# Altium PCB backpower_main.PcbDoc
Units mil, origin at the board's own origin, x right, y up, seen from the top; angles counter-clockwise.
Board outline 3650 x 3890 mil, 2 copper layers (Top Layer, Bottom Layer); 24 components, 12 nets, 64 pads, 27 vias.
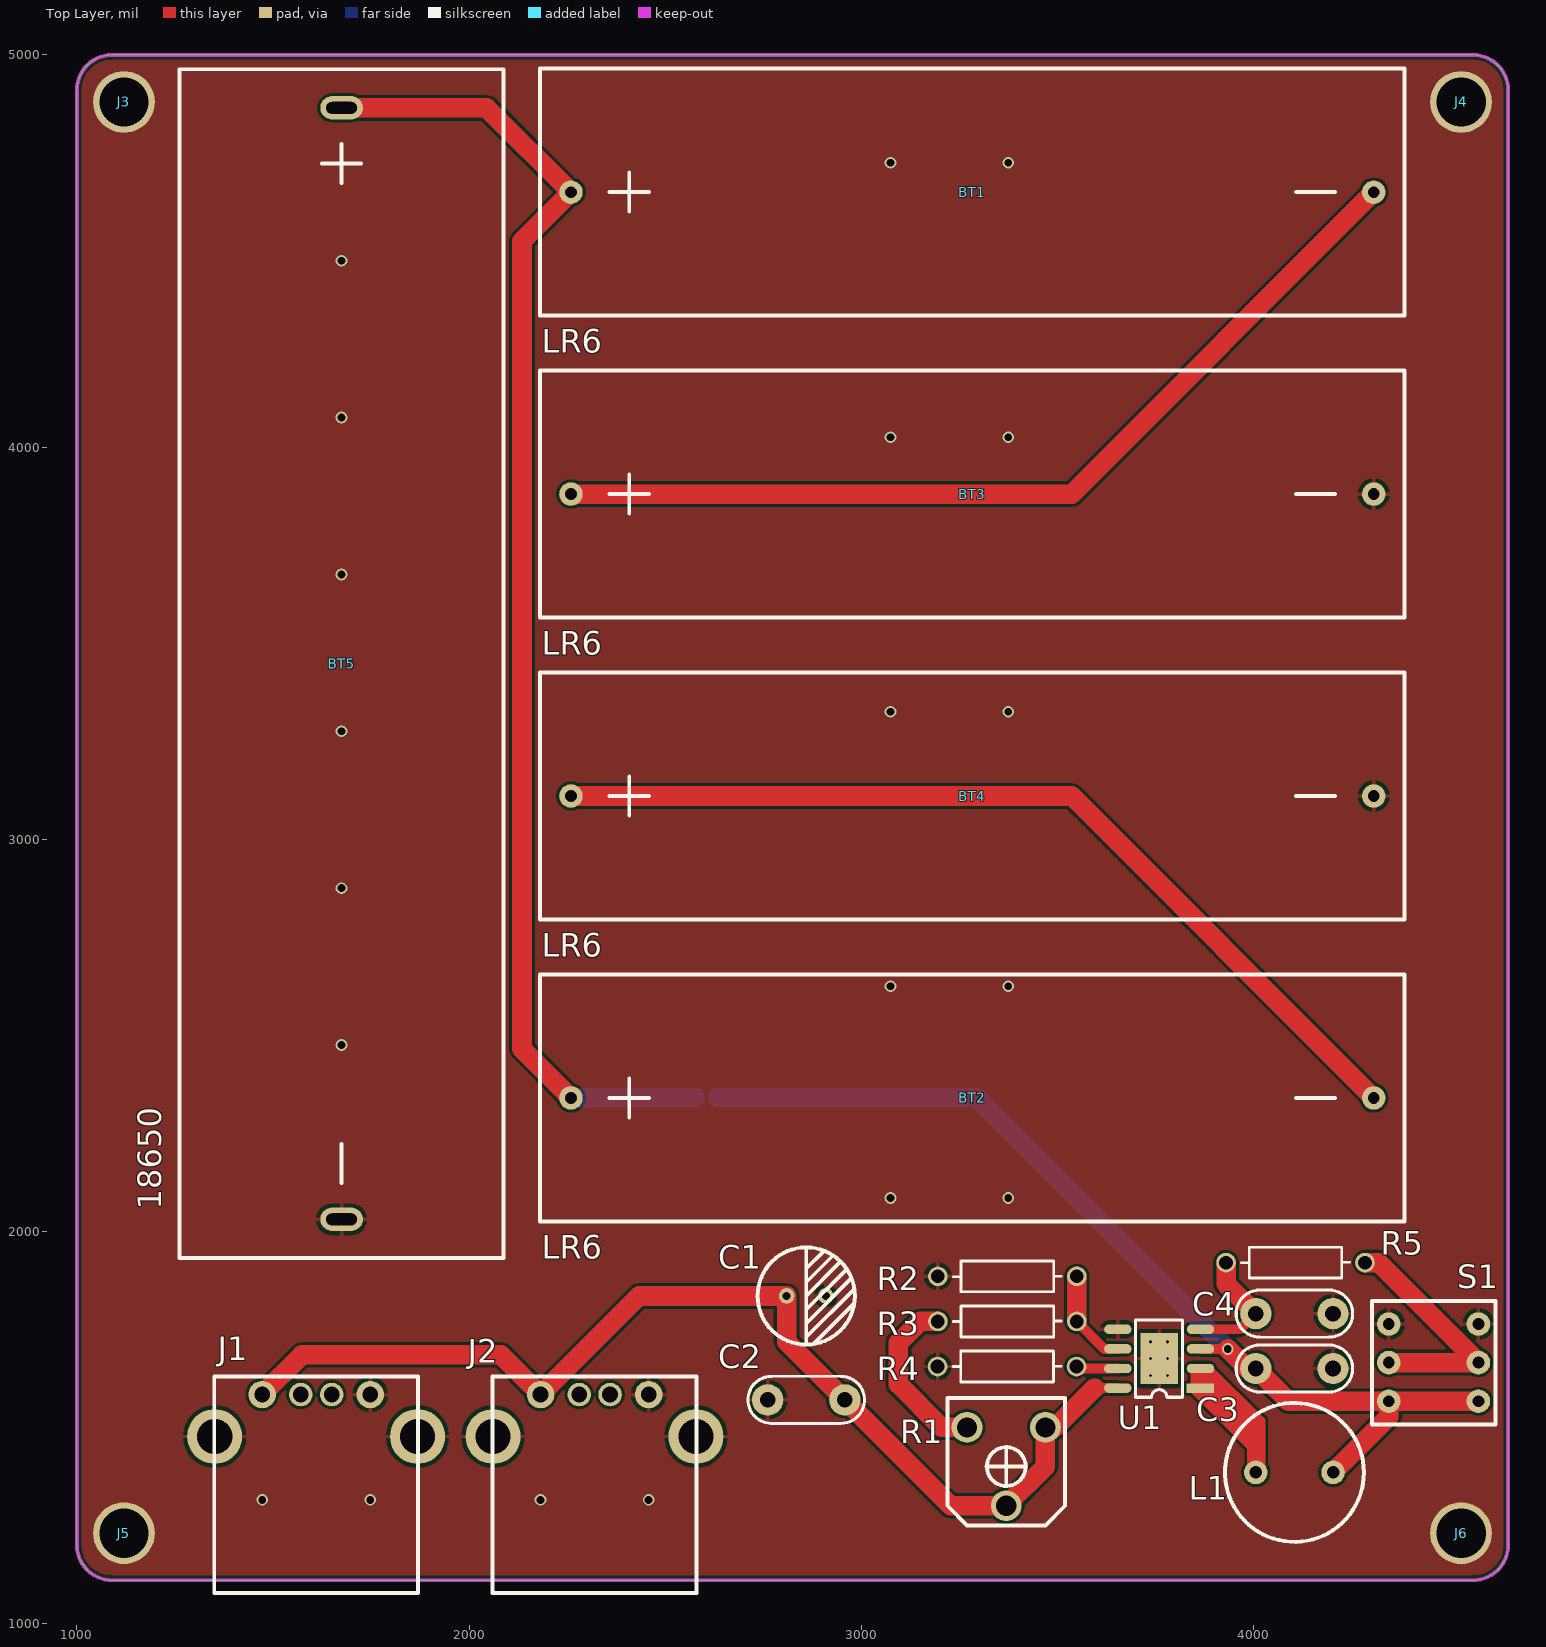
[diagram p0: Top Layer view]
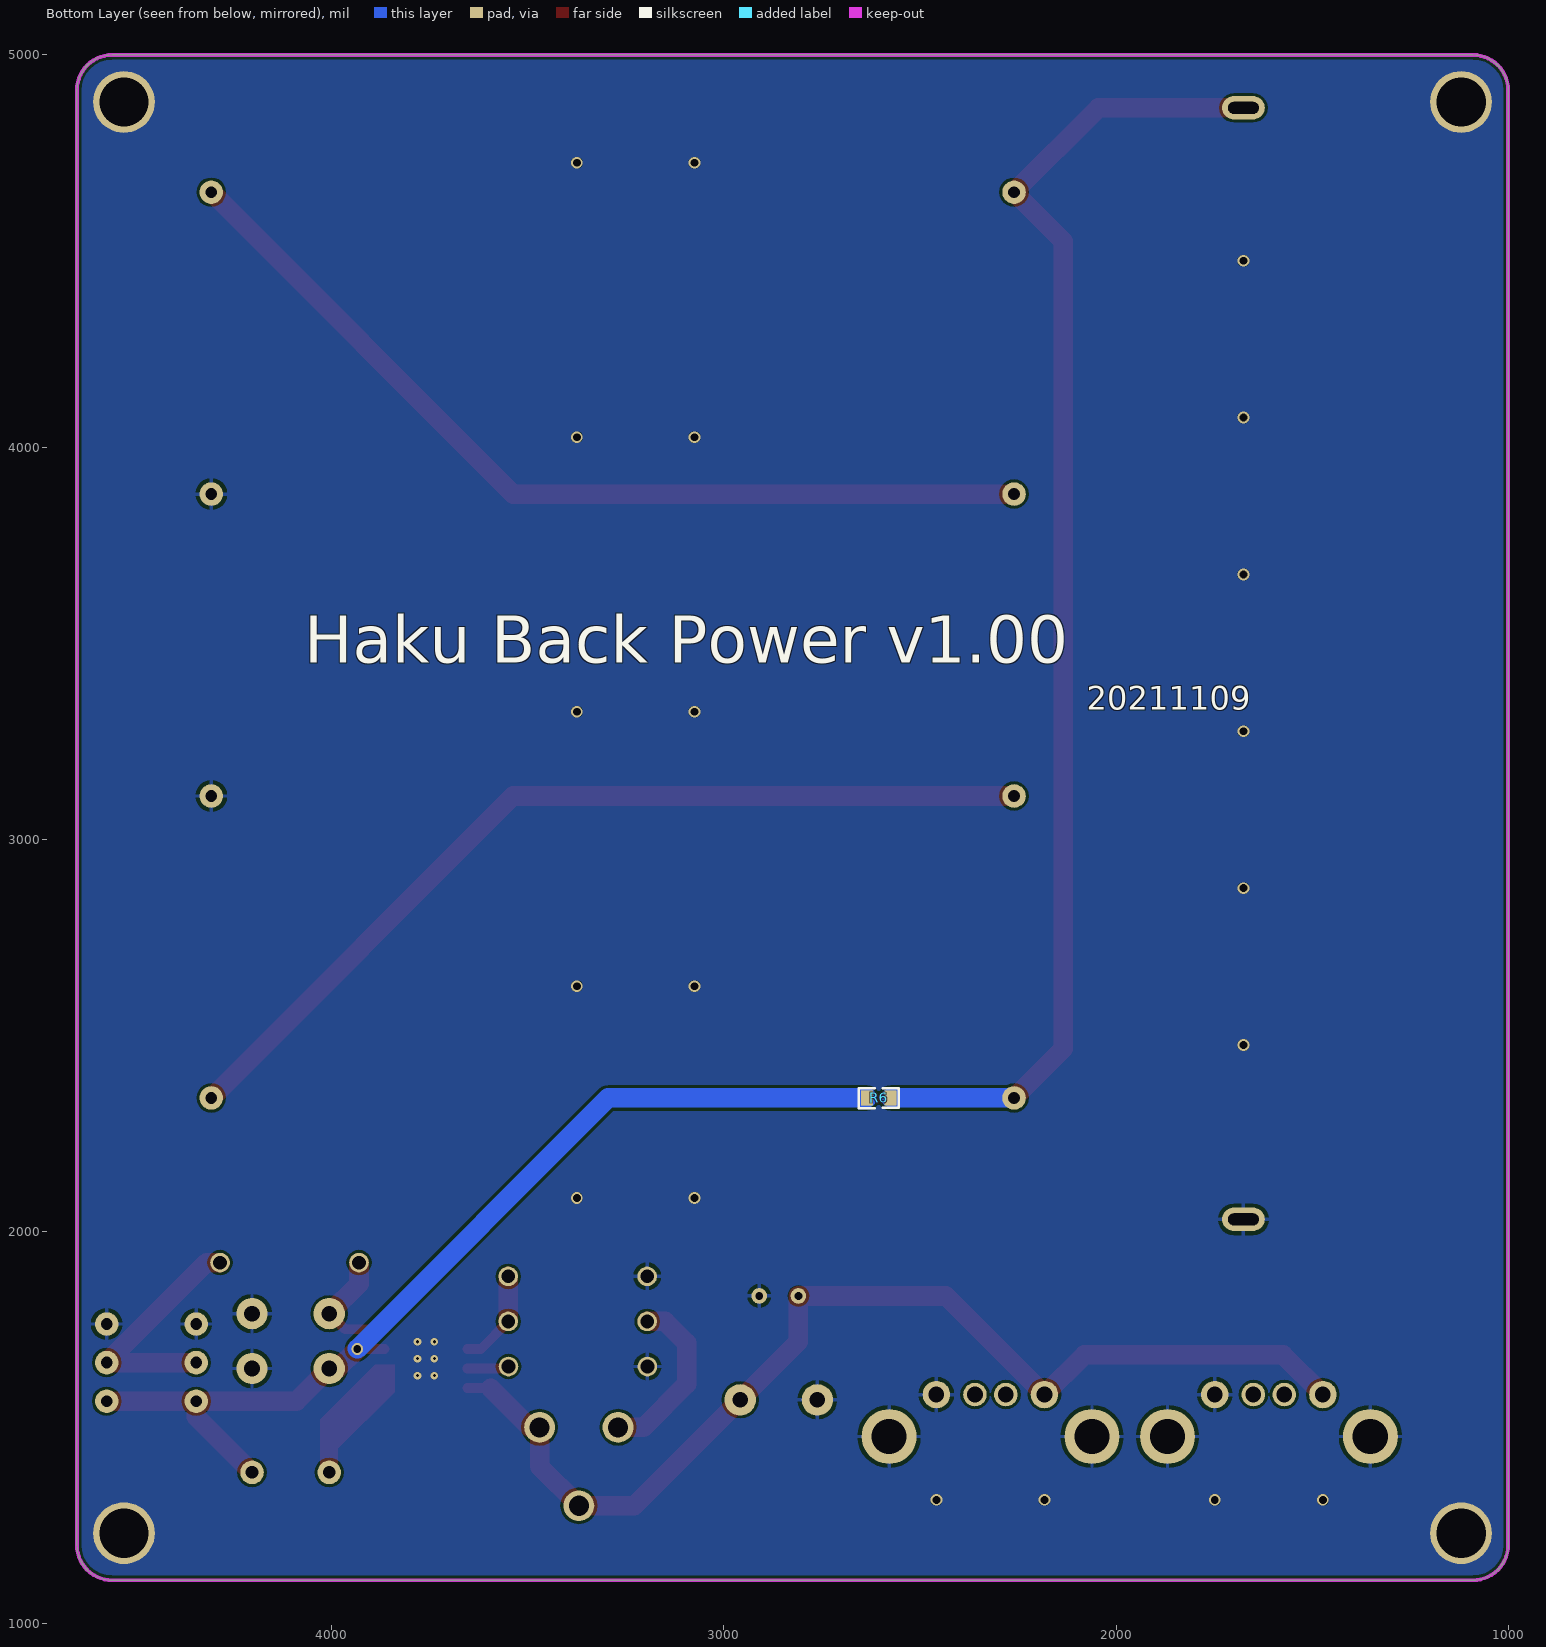
[diagram p1: Bottom Layer view, seen from below]

## Layer stack, top to bottom
Top Solder: solder mask 0.4, Solder Resist, Dk 3.5
Top Layer: signal copper 1.4
Dielectric 1: dielectric 12.6, FR-4, Dk 4.8
Bottom Layer: signal copper 1.4
Bottom Solder: solder mask 0.4, Solder Resist, Dk 3.5

## Board outline
1000,1200 1000,4910 cw(c1090,4910) 1090,5000 4560,5000 cw(c4560,4910) 4650,4910 4650,1200 cw(c4560,1200) 4560,1110 1090,1110 cw(c1090,1200)

## Design rules (kind name [scope] priority, off if disabled: settings)
Clearance [All] p1: gap=7 ignorepadtopadclearanceinfootprint=FALSE
DiffPairsRouting [All] p1: maxlimit=1000 minlimit=7 mostfreqgap=10 toplayer_minwidth=7 toplayer_maxwidth=1500 toplayer_prefwidth=15 bottomlayer_minwidth=7 bottomlayer_maxwidth=1500 bottomlayer_prefwidth=15 maxuncoupledlength=500
HoleSize [All] p1: absolutevalues=TRUE maxlimit=1000 minlimit=7 maxpercent=80.000 minpercent=20.000
PolygonConnect PolygonConnect_Via [(InPadClass('All Pads') And (not HasFootprint('PADR3/4')))] p1: connectstyle=Relief reliefconductorwidth=10 reliefentries=4 polygonreliefangle="90 Angle" airgapwidth=10
PolygonConnect PolygonConnect_Hole [HasFootprint('PADR3/4')] p2: connectstyle=Direct reliefconductorwidth=10 reliefentries=4 polygonreliefangle="90 Angle" airgapwidth=10
PolygonConnect [HasFootprint('PADR3/4')] p3: connectstyle=Direct reliefconductorwidth=10 reliefentries=4 polygonreliefangle="90 Angle" airgapwidth=10
RoutingCorners [All] p1: cornerstyle=45-Degree minsetback=10 maxsetback=100
RoutingVias [All] p1: holewidth=28 width=50 viastyle="Through Hole" minholewidth=10 minwidth=10 maxholewidth=200 maxwidth=500
SilkToSilkClearance [All] p1 off: silktosilkclearance=10
SilkToSolderMaskClearance [IsPad] p1 off: minsilkscreentomaskgap=10 clearancetoexposedcopper=TRUE
SolderMaskExpansion [All] p1: expansion=4
Width [All] p1: maxlimit=1000 minlimit=7 preferedwidth=10
25 further rules are at their usual default settings.

## Components (designator, comment, footprint, x,y, rotation, side; value= is the part's Value field where it differs from the comment)
BT1 "LR6" BAT-LR6 3283.62,4650 r0 top locked
BT2 "LR6" BAT-LR6 3283.62,2340 r0 top locked
BT3 "LR6" BAT-LR6 3283.62,3880 r0 top locked
BT4 "LR6" BAT-LR6 3283.62,3110 r0 top locked
BT5 "18650" BAT-18650 1675,3447.68 r270 top locked
C1 "100uF" "CAP D6.3" 2860,1835 r0 top value=100pF
C2 "226" C5mm 2860,1570 r180 top value=100pF
C3 "226" C5mm 4105,1650 r180 top locked value=100pF
C4 "102" C5mm 4105,1790 r180 top locked value=100pF
J1 "USB_A" "USB-A dip" 1610,1530 r0 top locked
J2 "USB_A" "USB-A dip" 2320,1530 r0 top locked
J3 "Hole" PADR3/4#1 1105,4880 r0 top locked
J4 "Hole" PADR3/4#2 4540,4865 r0 top locked
J5 "Hole" PADR3/4#3 1110,1225 r0 top locked
J6 "Hole" PADR3/4#4 4520,1215 r0 top locked
L1 "3R3" CKPK0912 4105,1385 r0 top locked value=10mH
R1 "503" VZ067 3370,1400 r180 top locked
R2 "10K" R1/4W 3550,1885 r180 top locked value=1K
R3 "68K" R1/4W 3195.67,1770 r0 top locked value=1K
R4 "100K" R1/4W 3195,1655 r0 top locked value=1K
R5 "10K" R1/4W 3930.67,1920 r0 top locked value=1K
R6 "0" R0603 2575,2340 r0 bottom value=1K
S1 "SW-DPDT" SW-8*8 4460,1665 r90 top locked
U1 "FP6276B" SOP8L_EP 3760,1675 r180 top locked

## Footprints (in the part's own frame and the unit in brackets; to place one, negate y for a bottom-side part, rotate by r counter-clockwise, add the part's x,y. Pads: shape width x height; smd on the part's side, far side on the other; paste and mask are expansions set on the pad)
BAT-18650 [mil]
  oval 60x108.74 hole 30 slot 78.74 at 90 deg: 1(-1417.32,0) 2(1417.32,0)
  silkscreen extent -1516,-413 1516,413
BAT-LR6 [mil]
  round 60 hole 30: 1(-1023.62,0) 2(1023.62,0)
  silkscreen extent -1102,-315 1102,315
C5mm [mil]
  round 80 hole 40: 1(-98.43,0) 2(98.43,0)
  silkscreen extent -148,-60 148,60, body extent -108,-49 108,49, height 197
"CAP D6.3" [mil] "D=6.3mm"
  round 40 hole 20: 1(-50,0) 2(50,0)
  silkscreen extent -124,-124 124,124
CKPK0912 [mil] "0912"
  round 60 hole 32: 1(-98.43,0) 2(98.43,0)
  silkscreen extent -177,-177 177,177
PADR3/4#1 [mm]
  round 4 hole 3.2: 1(0.381,0)
PADR3/4#2 [mm]
  round 4 hole 3.2: 1(-0.254,0.381)
PADR3/4#3 [mm]
  round 4 hole 3.2: 1(0.254,0.127)
PADR3/4#4 [mm]
  round 4 hole 3.2: 1(0.254,0.381)
R1/4W [mil]
  round 50 hole 35: 1(0,0) 2(354.33,0)
  silkscreen extent 39,-39 315,39, body extent -11,-40 363,39, height 79
R0603 [mil]
  rect 30x38 smd: 1(0,0) 2(60,0)
  silkscreen extent -21,-25 81,26, body extent -4,-19 64,19, height 22
SOP8L_EP [mil]
  rect 70x24 smd: 1(-105.32,75)
  oval 70x24 smd: 2(-105.32,25) 3(-105.32,-25) 4(-105.32,-75) 5(105.31,-75) 6(105.31,-25) 7(105.31,25) 8(105.31,75)
  rect 95.28x130.31 smd: 9(0,0)
  silkscreen extent -60,-98 60,98, body extent -118,-96 118,96, height 67
SW-8*8 [mil]
  round 60 hole 30: 1(0,114.17) 2(-98.43,114.17) 3(98.43,114.17) 4(0,-114.17) 5(-98.43,-114.17) 6(98.43,-114.17)
  silkscreen extent -157,-157 157,157
"USB-A dip" [mil]
  round 70 hole 40: 1(-137.5,53.5) 4(138.1,53.5)
  round 60 hole 40: 2(-39.1,53.5) 3(39.7,53.5)
  round 140 hole 90: 5(-258.7,-53.5) 6(258.7,-53.5)
  silkscreen extent -260,-453 260,100
VZ067 [mm] "VZ067 Variable Resistor"
  round 2 hole 1.3: 1(-2.54,-2.54) 2(0,2.54) 3(2.54,-2.54)
  silkscreen extent -3.81,-4.45 3.81,3.81

## Part data
BT1 BT2 BT3 BT4 BT5: library part Battery, "Multicell Battery", LatestRevisionDate=17-Jul-2002, LatestRevisionNote="Re-released for DXP Platform.", PackageDescription="Battery; 2 Leads", PackageReference=BAT-2, Published=24-Mar-1999, Publisher="Altium Limited"
C1: library part "Cap Pol1", "Polarized Capacitor (Radial)", LatestRevisionDate=17-Jul-2002, LatestRevisionNote="Re-released for DXP Platform.", PackageDescription="Polarized Capacitor (Radial); 2 Leads", PackageReference=RB7.6-15, Published=8-Jun-2000, Publisher="Altium Limited"
C2 C3 C4: library part Cap, "Capacitor", LatestRevisionDate=17-Jul-2002, LatestRevisionNote="Re-released for DXP Platform.", PackageDescription="Radial Cap, Thru-Hole; 2 Leads; 0.3 in Pin Spacing", PackageReference=RAD-0.3, Published=8-Jun-2000, Publisher="Altium Limited"
L1: library part "Inductor Iron", "Magnetic-Core Inductor", LatestRevisionDate=17-Jul-2002, LatestRevisionNote="Re-released for DXP Platform.", PackageDescription="Axial Device, Thru-Hole; 2 Leads; 0.9 in Pin Spacing", PackageReference=AXIAL-0.9, Published=24-Mar-1999, Publisher="Altium Limited"
R1: library part "Res Adj1"
R2 R3 R4 R5 R6: library part Res2, "Resistor", LatestRevisionDate=17-Jul-2002, LatestRevisionNote="Re-released for DXP Platform.", PackageDescription="Axial Device, Thru-Hole; 2 Leads; 0.4 in Pin Spacing", PackageReference=AXIAL-0.4, Published=8-Jun-2000, Publisher="Altium Limited"
S1: "Double-Pole, Double-Throw Switch", LatestRevisionDate=17-Jul-2002, LatestRevisionNote="Re-released for DXP Platform.", PackageDescription="Switch; 6 Leads", PackageReference=DPDT-6, Published=24-Mar-1999, Publisher="Altium Limited"

## Via types
v1: diameter 30, hole 20, Top Layer to Bottom Layer, tented both sides, 21 vias
v2: diameter 19.68, hole 7.87, Top Layer to Bottom Layer, tented both sides, 6 vias

## Nets (pads, with @x,y where several pads share a name; then routed paths per layer and width w, separated by ;. In a path a pad name is that pad's centre, name@x,y a point inside that pad or via, vN(x,y) a via of type N, cw(c..) or ccw(c..) an arc to the next point about the centre after c; other vN are vias at no path point)
3V: C3.2 L1.2 R6.2 S1.2 S1.5 U1.3 | length 2569.8
  Top Layer w25: U1.3 v1(3935,1700)
  Top Layer w50: v1(3935,1700) 3985,1650 C3.2 4090,1566.57 S1.2 ; L1.2 4345.83,1527.4 S1.2 ; S1.5 S1.2
  Bottom Layer w50: R6.2 3295,2340 v1(3935,1700)
5V: C1.1 C2.1 J1.1 J2.1 R1.1 R1.2 U1.8 | length 2843.2
  Top Layer w25: 3595,1600 U1.8
  Top Layer w50: J1.1 1574,1685 2081,1685 J2.1 2434,1835 C1.1 2810,1718.43 C2.1 3228.43,1300 R1.2 3470,1400 R1.1 3495,1500 3595,1600
GND: BT3.2 BT4.2 BT5.2 C1.2 C2.2 C3.1 C4.1 J1.4 J1.5 J1.6 J2.4 J2.5 J2.6 J3.1 J4.1 J5.1 J6.1 R2.2 R4.1 S1.3 S1.6 U1.5 U1.9
  other v1: 1472.5,1315 1748.1,1315 2182.5,1315 2458.1,1315 3075,2085 3375,2085 1675,2475 3075,2625 3375,2625 1675,2875 1675,3275 3075,3325 3375,3325 1675,3675 3075,4025 3375,4025 1675,4075 1675,4475 3075,4725 3375,4725
  other v2: 3738.35,1631.69 3781.65,1631.69 3738.35,1675 3781.65,1675 3738.35,1718.31 3781.65,1718.31
NetBT1_1: BT1.1 BT2.1 BT5.1 R6.1 | length 3402.6
  Top Layer w50: BT5.1 2045,4865 BT1.1 2135,4525 2135,2465 BT2.1
  Bottom Layer w50: BT2.1 R6.1
NetBT1_2: BT1.2 BT3.1 | length 2366.2
  Top Layer w50: BT3.1 3537.24,3880 BT1.2
NetBT2_2: BT2.2 BT4.1 | length 2366.2
  Top Layer w50: BT4.1 3537.24,3110 BT2.2
NetL1_1: L1.1 U1.1 U1.2 | length 273.5
  Top Layer w25: U1.1 3865.32,1584.68 4006.57,1443.43 L1.1
NetR1_3: R1.3 R3.1 | length 449
  Top Layer w50: R3.1 3150,1770 3095,1715 3095,1610 3205,1500 R1.3
NetR2_1: R2.1 R3.2 U1.6 | length 248.7
  Top Layer w25: R3.2 3620,1700 U1.6
  Top Layer w50: R3.2 R2.1
NetR4_2: R4.2 U1.7 | length 107.4
  Top Layer w25: R4.2 3554.33,1650 U1.7
NetR5_2: R5.2 S1.1 S1.4 | length 623.1
  Top Layer w50: R5.2 4319.17,1920 S1.4 S1.1
SWITCH: C4.2 R5.1 U1.4 | length 319.3
  Top Layer w25: U1.4 3966.57,1750 C4.2
  Top Layer w50: R5.1 3930.67,1865.91 C4.2
pads on no net: J1.2 J1.3 J2.2 J2.3

## Polygon pours and split planes (outlines as drawn)
GND on Bottom Layer "Bottom Layer-GND" (solid, pour order 0): 1000,5000 4650,5000 4650,1110 1000,1110
GND on Top Layer "Top Layer-GND" (solid, pour order 2): 1000,5000 4650,5000 4645,4995 4645,1110 1000,1110

## Keep-outs
Keep-Out Layer:
  the board outline again, w10

## Other copper
Top Layer:
  region net NetL1_1: 3840,1660 3890,1660 4030,1520 4030,1370 3985,1370 3985,1445 3840,1590

## Silkscreen, mask and mechanical layers (free items; w line width, h text height)
Bottom Overlay:
  text "Haku Back Power v1.00" at 4070,3450 h120
  text "20211109" at 2075,3330 h60